# Allegro board OSCILATOR.brd
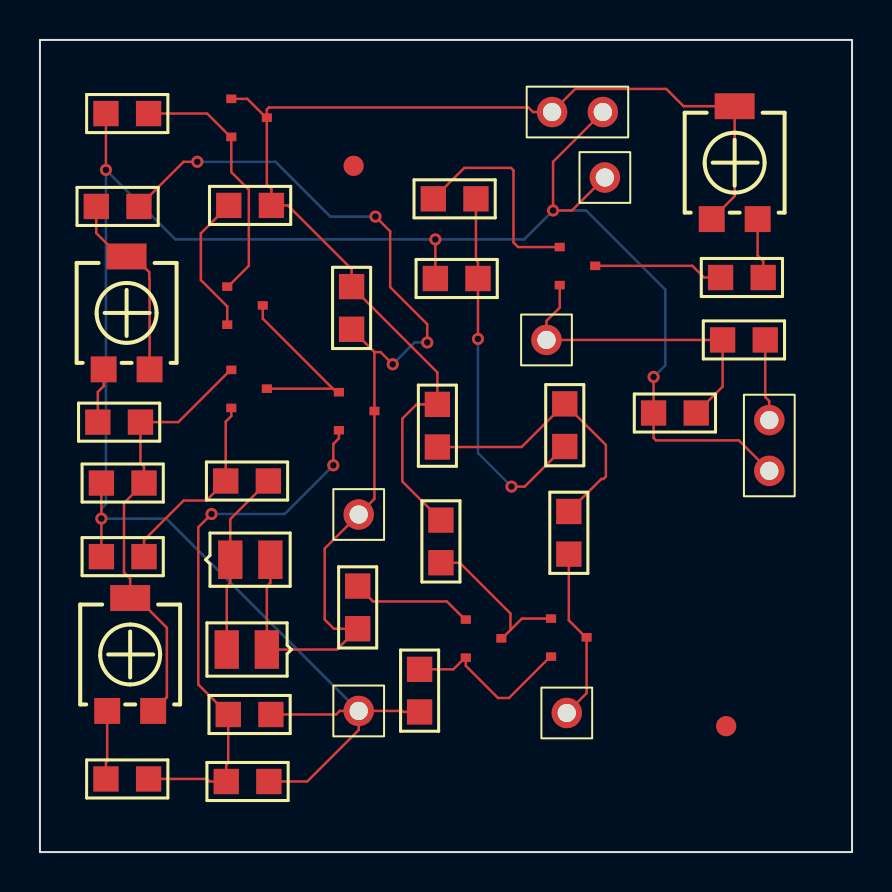
[diagram p0: board, top side]
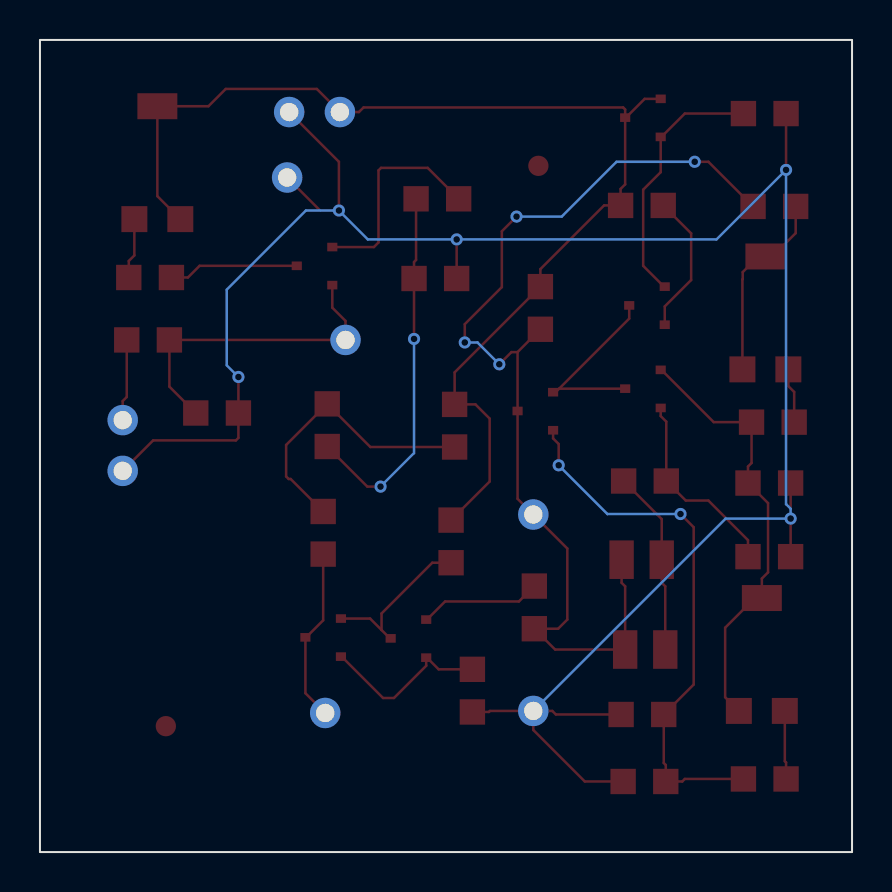
[diagram p1: board, bottom side, seen from below]

Outline 40.64 x 40.64 mm; copper layers: TOP, BOTTOM. Coordinates in mm from the lower left corner of the outline.
Outline path: rectangle 0,0 40.64,40.64

## Design rules (mm)
constraint set DEFAULT: min track width 0.127
nets with their own width: min track width 0.127; nets GND N94501 N94669 N94751 N94781 N95079 N95085 N95089

## Placement (name value [footprint] x y rotation side)
C1  220n  [SMC0805]  2.82 32.31 0 top
C2  220n  [SMC0805]  3.07 18.47 0 top
C3  10u  [SMC0805]  11.56 6.88 180 top
C4  10u  [SMC0805]  9.3 18.57 0 top
C5  470n  [SMC0805]  19.79 28.7 0 top
C6  1n  [SMC0805]  34.16 25.63 0 top
D1  D1N4148  [SMD080512]  9.53 14.63 0 top
D2  D1N4148  [SMD080512]  11.35 10.13 180 top
DZ  BZX84C2V7  [SOT23]  10.46 36.75 0 top
J1  LOAD  [JUMPER2]  36.5 21.62 270 top
J2  VCC  [JUMPER2]  25.63 37.03 0 top
J3  GND  [JUMPER1]  15.95 7.06 0 top
J4  GND  [JUMPER1]  28.27 33.76 0 top
J5  SIN  [JUMPER1]  15.95 16.89 0 top
J6  SQUARE  [JUMPER1]  26.37 6.96 0 top
J7  TRIANGLE  [JUMPER1]  25.35 25.63 0 top
NOREF  -  [unnamed]  15.7 34.34 0 top
NOREF#2  -  [unnamed]  34.34 6.3 0 top
POT1  10k  [TS53YL]  5.49 24.16 270 top
POT2  10k  [TS53YL]  5.66 7.06 270 top
POT3  10k  [TS53YL]  35.92 31.67 270 top
Q1  BC856B  [SOT23]  10.26 27.36 0 top
Q2  BC846B  [SOT23]  10.46 23.19 0 top
Q3  BC846B  [SOT23]  15.85 22.07 0 top
Q4  BC846B  [SOT23]  22.2 10.69 0 top
Q5  BC846B  [SOT23]  26.47 10.74 0 top
Q6  BC856B  [SOT23]  26.9 29.34 0 top
R1  100  [SMR0805]  5.03 21.51 180 top
R2  100  [SMR0805]  5.44 3.66 180 top
R3  3.3k  [SMR0805]  5.21 14.78 180 top
R4  0.2k  [SMR0805]  11.46 3.53 180 top
R5  2.2k  [SMR0805]  3.3 36.96 0 top
R6  2k  [SMR0805]  9.45 32.36 0 top
R7  0.2k  [SMR0805]  15.6 26.16 90 top
R8  150k  [SMR0805]  15.9 11.18 90 top
R9  1k  [SMR0805]  20.07 14.48 90 top
R10  5k  [SMR0805]  26.47 14.91 90 top
R11  1k  [SMR0805]  19.89 20.27 90 top
R12  50  [SMR0805]  19 7.01 90 top
R13  5k  [SMR0805]  26.26 20.29 90 top
R14  25k  [SMR0805]  19.68 32.69 0 top
R15  1k  [SMR0805]  34.06 28.75 0 top
R16  100k  [SMR0805]  30.71 21.97 0 top

## Library data of the parts
C1-C6 = C
D1 D2 = D1N4148
DZ = BZX84C2V7_1
J1 J2 = CON2: User Part Number: ***
J3-J7 = CON1: User Part Number: ***
POT1-POT3 = POT
Q1 Q6 = BC856B
Q2-Q5 = BC846B
R1-R16 = R

## Footprints (pads in the part's own frame, mm; a bottom-side part is the same pattern mirrored in y, then rotated)
JUMPER1
  round 1.524 hole 0.914: 1(0,0)
JUMPER2
  round 1.524 hole 0.914: 1(0,0) 2(2.54,0)
SMC0805
  rect 1.27x1.27 smd: 1(0,0) 2(2.134,0)
SMD080512
  rect 1.219x1.93 smd: 1(0,0) 2(2.007,0)
SMR0805
  rect 1.27x1.27 smd: 1(0,0) 2(2.134,0)
SOT23
  rect 0.508x0.432 smd: 1(-0.889,0.94) 2(-0.889,-0.965) 3(0.889,0)
TS53YL
  rect 1.3x1.3 smd: 1(0,0) 3(0,-2.3)
  rect 1.3x2 smd: 2(-5.65,-1.15)
unnamed
  round 1.016 smd: (0,0)

## Nets
GND: C2.1 C3.1 C5.1 J1.2 J2.2 J3.1 J4.1 R3.2 R4.1 R5.1 R12.1 R16.1
N94313: DZ.1 DZ.3(PLUS) J2.1 POT3.2(T) POT3.3 R6.2 R7.2 R9.2 R11.2
N94383: C1.2 D1.2 D2.1 J5.1 Q3.3 R7.1 R8.1
N94397: POT3.1 R15.2
N94495: Q6.3 R15.1
N94501: C1.1 POT1.1 POT1.2(T)
N94547: R10.2 R11.1 R13.2
N94637: C5.2 R13.1 R14.2
N94669: Q4.3 Q5.1 R9.1
N94751: Q1.2(E) R6.1
N94757: C6.1 J7.1 Q6.2(E) R16.2
N94781: POT1.3 R1.2
N94831: J6.1 Q5.3 R10.1
N94841: C6.2 J1.1
N94865: C4.2 D1.1 D2.2
N95013: DZ.2 Q1.1 R5.2
N95079: Q4.1 R8.2
N95085: Q4.2(E) Q5.2(E) R12.2
N95089: Q1.3 Q2.3 Q3.1
N95235: C3.2 Q3.2(E) R2.1 R4.2
N95241: C2.2 POT2.1 POT2.2(T) Q2.1 R1.1
N95307: C4.1 Q2.2(E) R3.1
N95407: POT2.3 R2.2
N945811: Q6.1 R14.1

## Via types
v1: diameter 0.61, hole 0.33, TOP to BOTTOM, 13 vias

## Routing (per net, layer and track width the routed paths; a pad name or vN(x,y) marks a point on that pad's centre or on a via; arc(x,y) is an arc through that point)
GND: length 112
  TOP w0.127: C2.1 v1(3.07,16.69) R3.2 ; J3.1 15.95,6.11 13.37,3.53 R4.1 ; J3.1 15,7.06 14.82,6.88 C3.1 ; J3.1 18.12,7.06 18.17,7.01 R12.1 ; C5.1 v1(19.79,30.66) ; R5.1 v1(3.3,34.14) ; J2.2 25.68,34.54 v1(25.68,32.11) 26.62,32.11 J4.1 ; v1(30.71,23.77) R16.1 30.71,20.73 30.84,20.6 34.98,20.6 J1.2
  BOTTOM w0.127: v1(30.71,23.77) 31.29,24.36 31.29,28.14 27.33,32.11 v1(25.68,32.11) 24.23,30.66 v1(19.79,30.66) 6.78,30.66 v1(3.3,34.14) 3.3,17.41 3.07,17.18 v1(3.07,16.69) 6.32,16.69 J3.1
N94313: length 59.4
  TOP w0.127: DZ.1 10.38,37.69 11.32,36.75 DZ.3 ; DZ.3 11.35,33.41 11.58,33.19 R6.2 12.41,32.36 15.6,29.17 R7.2 19.89,24 R11.2 18.85,22.4 18.14,21.69 18.14,18.54 R9.2 ; DZ.3 11.35,37.16 11.46,37.26 24.45,37.26 24.68,37.03 J2.1 26.78,38.19 31.34,38.19 32.21,37.32 POT3.2 34.77,32.82 POT3.3
N94383: length 52
  TOP w0.127: v1(17.65,24.41) 17.04,25.02 16.74,25.02 ; v1(7.87,34.54) 7.19,34.54 C1.2 ; v1(16.79,31.8) 17.53,31.06 17.53,28.27 19.38,26.42 v1(19.38,25.5) ; R7.1 16.74,25.02 ; 16.74,25.02 Q3.3 16.74,17.68 J5.1 14.25,15.19 14.25,11.63 14.71,11.18 R8.1 14.86,10.13 D2.1 11.35,13.3 11.53,13.47 D1.2
  BOTTOM w0.127: v1(7.87,34.54) 11.79,34.54 14.53,31.8 v1(16.79,31.8) ; v1(17.65,24.41) 18.75,25.5 v1(19.38,25.5)
N94397: length 3
  TOP w0.127: R15.2 36.2,29.58 35.92,29.86 POT3.1
N94495: length 6.5
  TOP w0.127: R15.1 33.24,28.75 32.65,29.34 Q6.3
N94501: length 9.7
  TOP w0.127: POT1.1 5.49,28.66 5.47,28.67 5.47,29.02 4.69,29.81 POT1.2 3.99,29.81 2.82,30.97 C1.1
N94547: length 14.3
  TOP w0.127: R10.2 28.09,18.67 28.19,18.67 28.32,18.8 28.32,20.37 R13.2 24.1,20.27 R11.1
N94637: length 18.6
  TOP w0.127: R14.2 21.82,29.63 21.92,29.53 C5.2 v1(21.92,25.68) ; v1(23.6,18.29) 24.26,18.29 R13.1
  BOTTOM w0.127: v1(23.6,18.29) 21.92,19.96 v1(21.92,25.68)
N94669: length 8.3
  TOP w0.127: Q5.1 24.12,11.68 23.55,11.11 ; R9.1 21.01,14.48 23.55,11.94 23.55,11.11 ; 23.55,11.11 23.13,10.69 Q4.3
N94751: length 7.1
  TOP w0.127: R6.1 8.05,30.96 8.05,28.63 9.37,27.3 Q1.2
N94757: length 16
  TOP w0.127: Q6.2 26.01,27.24 25.35,26.58 J7.1 C6.1 34.16,23.29 R16.2
N94781: length 2.8
  TOP w0.127: POT1.3 3.19,23.31 2.9,23.02 R1.2
N94831: length 8.8
  TOP w0.127: R10.1 26.47,11.6 27.32,10.74 Q5.3 27.36,7.95 J6.1
N94841: length 4.1
  TOP w0.127: J1.1 36.5,22.57 36.3,22.77 C6.2
N94865: length 9.3
  TOP w0.127: C4.2 9.53,16.66 D1.1 9.53,13.47 9.35,13.3 D2.2
N95013: length 12.9
  TOP w0.127: R5.2 8.37,36.96 9.54,35.79 DZ.2 9.58,34.02 10.45,33.15 10.45,29.34 9.41,28.3 Q1.1
N95079: length 6.1
  TOP w0.127: Q4.1 21.27,11.63 20.37,12.54 16.67,12.54 R8.2
N95085: length 8.8
  TOP w0.127: R12.2 20.69,9.14 21.27,9.73 Q4.2 21.31,9.32 22.92,7.71 23.47,7.71 25.54,9.78 Q5.2
N95089: length 9.3
  TOP w0.127: 14.66,23.19 14.83,23.01 Q3.1 ; 14.66,23.19 Q2.3 ; 14.66,23.19 11.15,26.7 Q1.3
N95235: length 27.2
  TOP w0.127: v1(14.68,19.35) 14.68,20.42 14.96,20.7 Q3.2 ; R2.1 8.37,3.66 8.5,3.53 R4.2 9.32,4.36 9.42,4.46 C3.2 7.92,8.38 7.92,16.26 v1(8.59,16.92)
  BOTTOM w0.127: v1(8.59,16.92) 12.24,16.92 v1(14.68,19.35)
N95241: length 22
  TOP w0.127: POT2.1 6.35,7.75 6.35,11.23 4.86,12.71 POT2.2 4.51,13.68 4.2,14 4.2,17.46 C2.2 5.21,19.29 5.03,19.47 R1.1 6.92,21.51 9.54,24.13 Q2.1
N95307: length 9.9
  TOP w0.127: R3.1 5.21,15.61 7.19,17.59 8.32,17.59 C4.1 9.3,21.54 9.58,21.82 Q2.2
N95407: length 3.4
  TOP w0.127: R2.2 3.3,4.48 3.36,4.55 POT2.3
N945811: length 10.7
  TOP w0.127: R14.1 21.23,34.24 23.57,34.24 23.7,34.11 23.7,30.51 23.93,30.28 Q6.1

## Text on the board
Ref Des/Assembly Top: Chelaru Vlad-Andrei | PDCE 1 2023-2024 | Grupa 433B
